# Altium PCB PCB.PcbDoc
Units mm, origin at the board's own origin, x right, y up, seen from the top; angles counter-clockwise.
Board outline 84 x 100 mm, 4 copper layers (Top Layer, Layer2, Layer3, Bottom Layer), stack 1.482 mm thick; 33 components, 28 nets, 172 pads, 8 vias.
Unrouted connection lines stored in the file: 72.
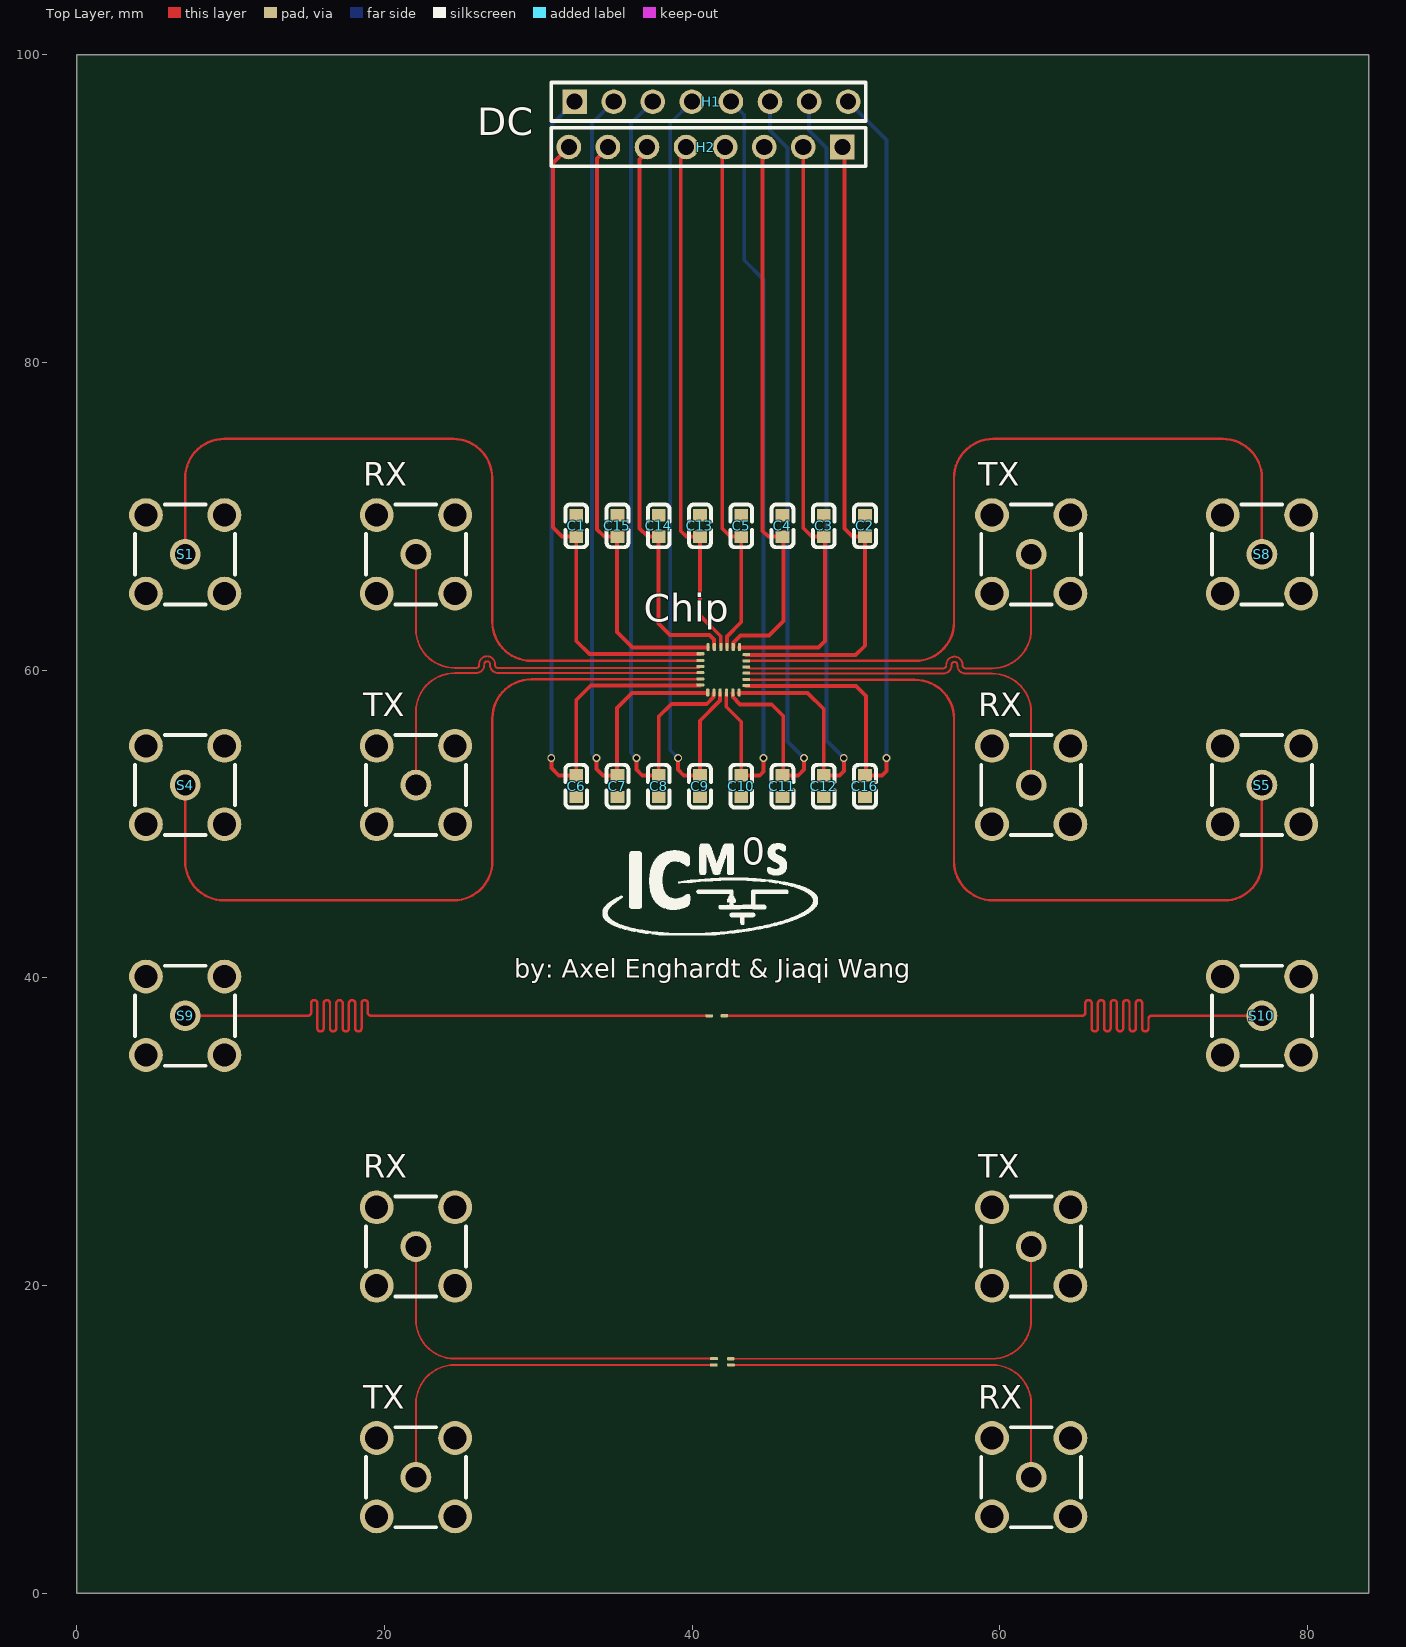
[diagram p0: Top Layer view]
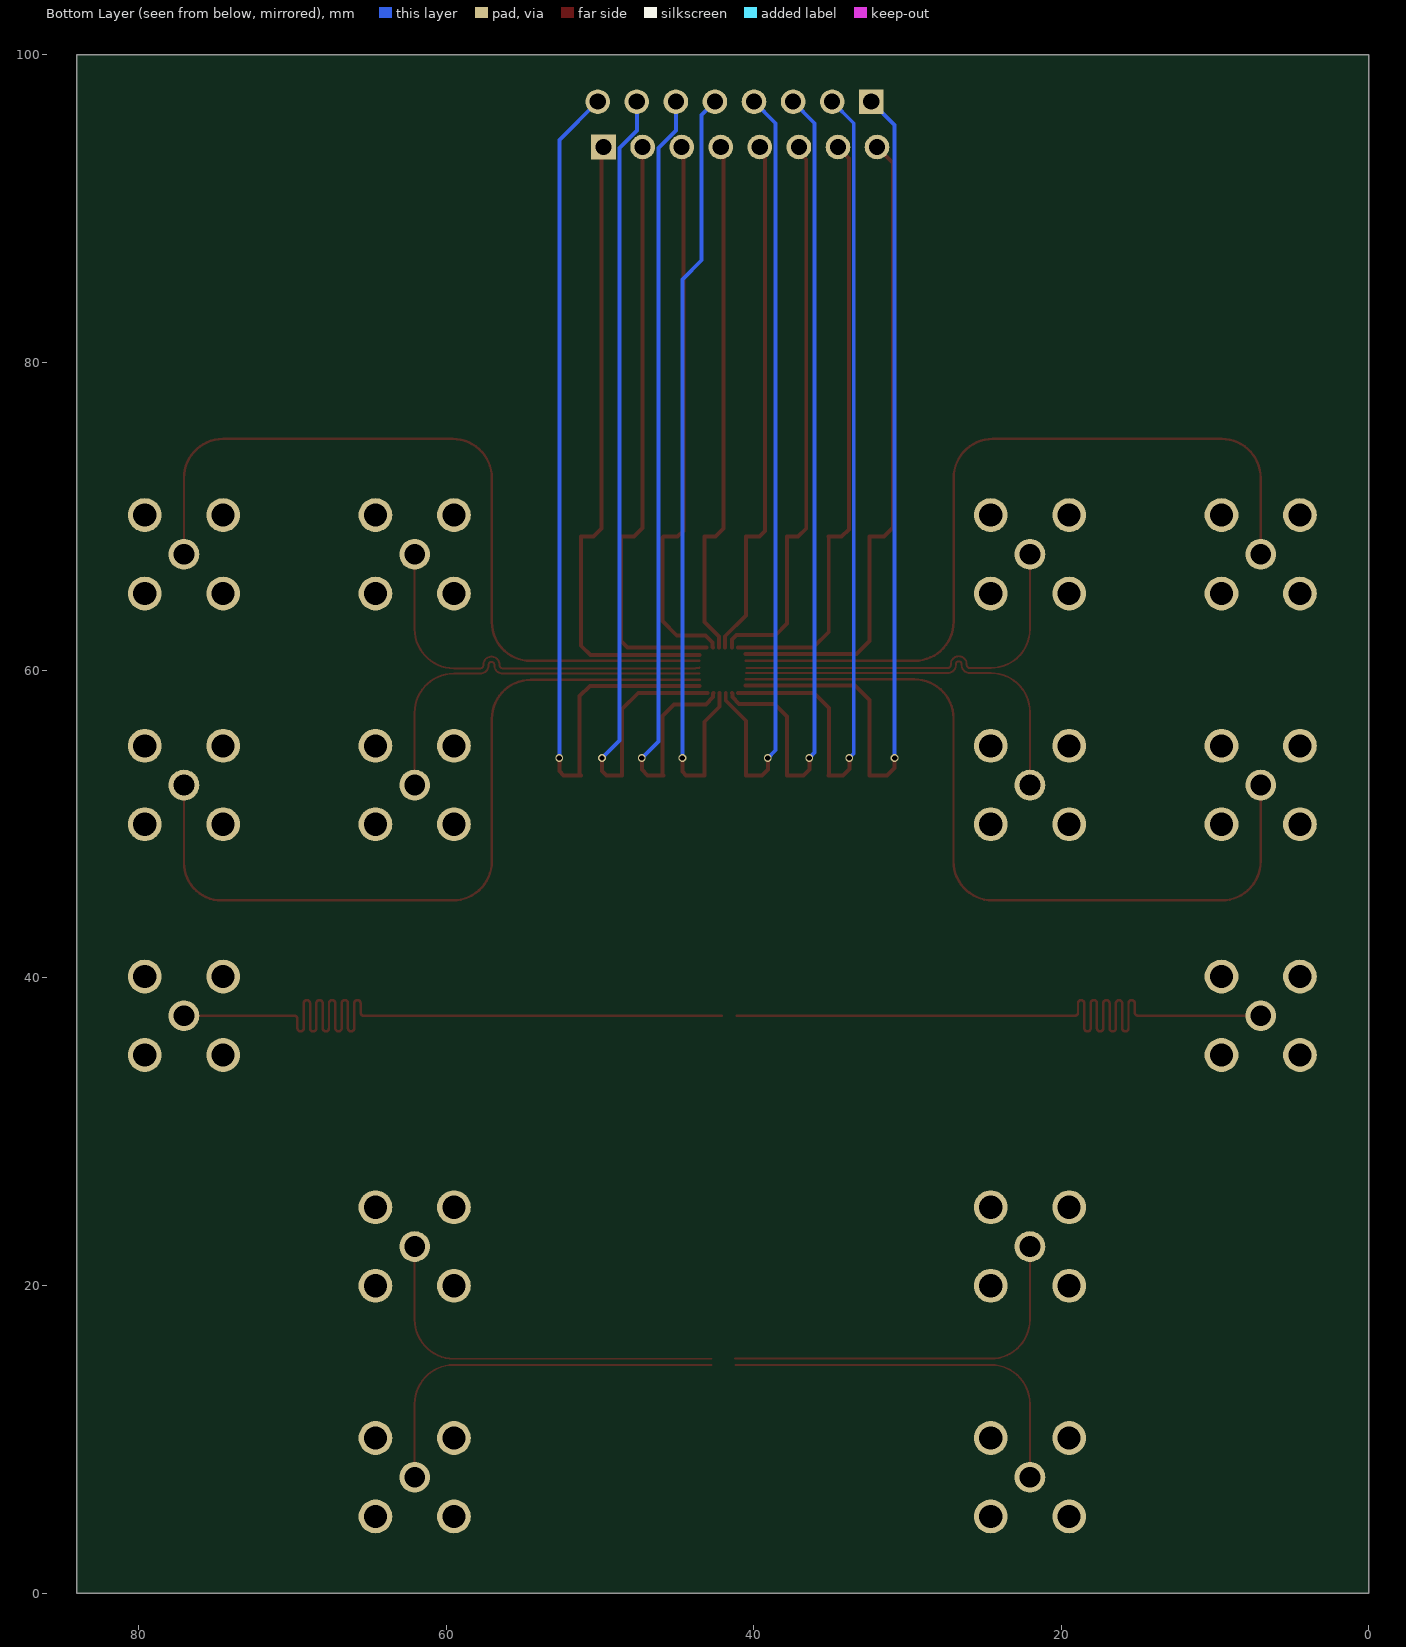
[diagram p1: Bottom Layer view, seen from below]
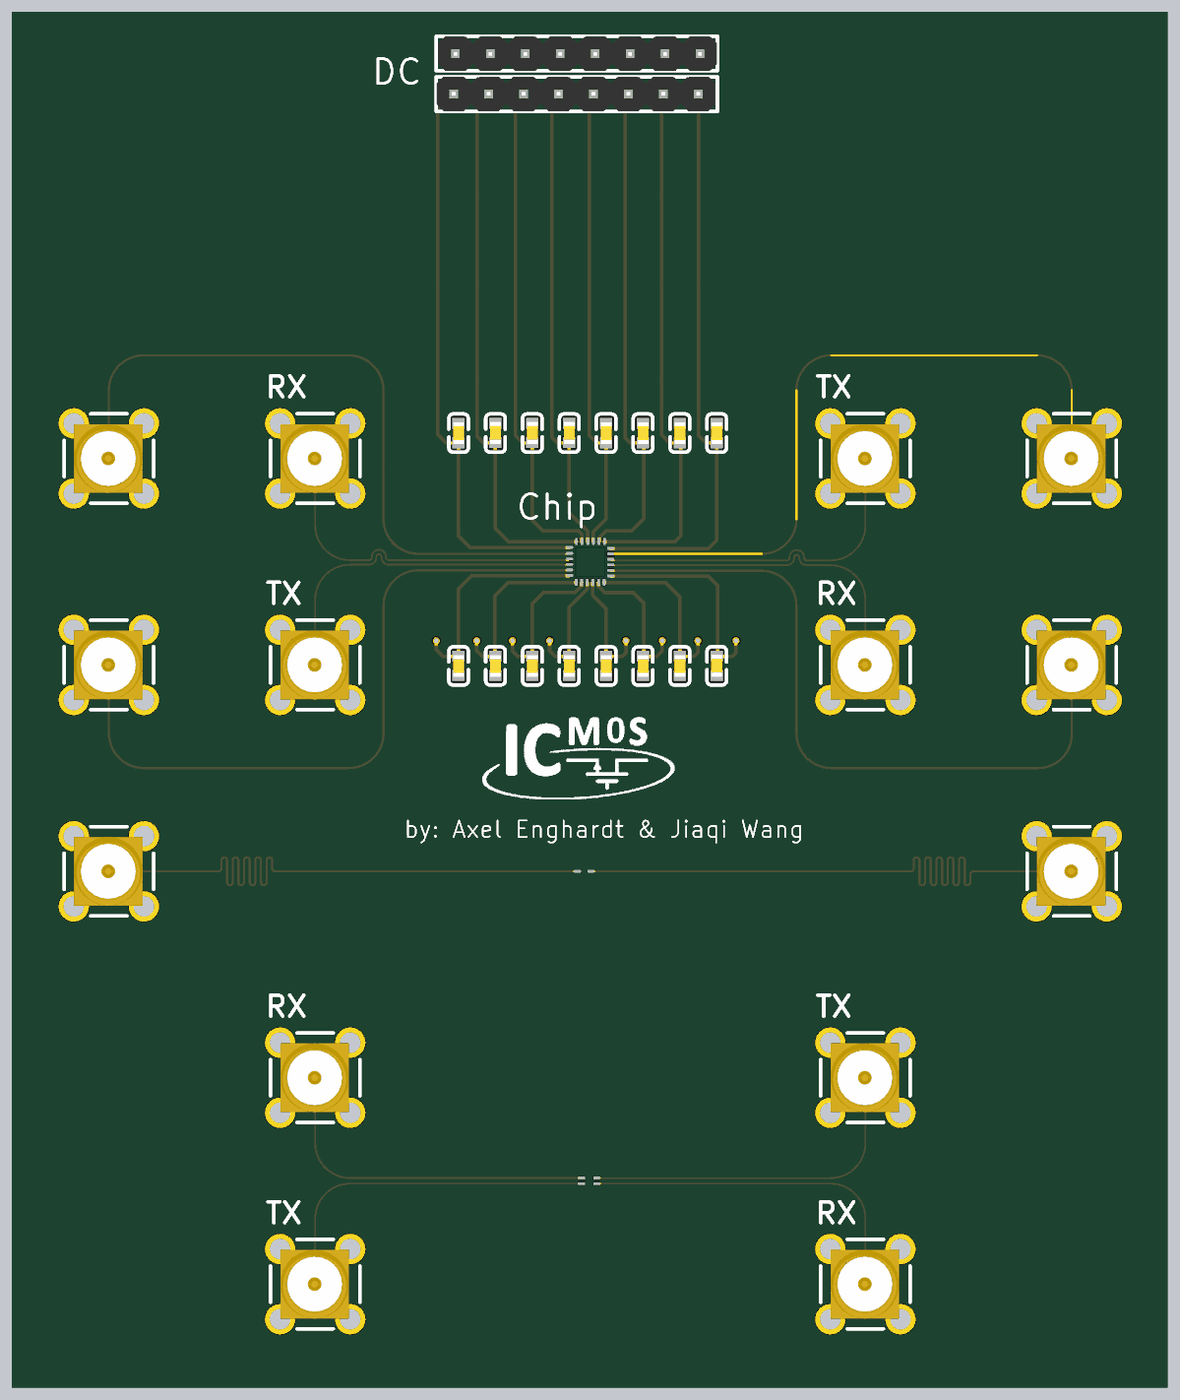
[diagram p2: 3D render of the assembled board from above, using the file's embedded part models]

## Layer stack, top to bottom
Top Solder: solder mask 0.035, Solder Resist, Dk 3.5
Top Layer: signal copper 0.168
Dielectric 2: prepreg 0.018, PP-006, Dk 4.1
Layer2: signal copper 0.2
Dielectric 1: dielectric 0.71, FR-4, Dk 4.8
Layer3: signal copper 0.2
Dielectric 3: prepreg 0.018, PP-006, Dk 4.1
Bottom Layer: signal copper 0.168
Bottom Solder: solder mask 0.035, Solder Resist, Dk 3.5

## Board outline
0,0 0,100 84,100 84,0

## Design rules (kind name [scope] priority, off if disabled: settings)
Clearance [All] p1: gap=0.1 ignorepadtopadclearanceinfootprint=FALSE
DiffPairsRouting [All] p1: maxlimit=100 minlimit=0.203 mostfreqgap=0.203 toplayer_minwidth=0.01 toplayer_maxwidth=0.124 toplayer_prefwidth=0.124 midlayer1_minwidth=0.01 midlayer1_maxwidth=0.124 midlayer1_prefwidth=0.124 midlayer2_minwidth=0.01 midlayer2_maxwidth=0.124 midlayer2_prefwidth=0.124 bottomlayer_minwidth=0.01 bottomlayer_maxwidth=0.124 bottomlayer_prefwidth=0.124 maxuncoupledlength=12.7
MinimumSolderMaskSliver [All] p1: minsoldermaskwidth=0.1
PolygonConnect [All] p1: connectstyle=Relief reliefconductorwidth=0.254 reliefentries=4 polygonreliefangle="90 Angle" airgapwidth=0.254
RoutingVias [All] p1: holewidth=0.711 width=1.27 viastyle="Through Hole" minholewidth=0.2 minwidth=0.4 maxholewidth=0.711 maxwidth=1.27
SilkToSolderMaskClearance [IsPad] p1: minsilkscreentomaskgap=0.1 clearancetoexposedcopper=TRUE
SolderMaskExpansion [All] p1: expansion=0.102 istentingtop=FALSE
SupplyNets "Schematic Supply Nets" [InNet('GND')] p1: voltage=0.000
Width RF [InNetClass('RF')] p1: maxlimit=0.156 minlimit=0.156 preferedwidth=0.156
Width [All] p2: maxlimit=0.254 minlimit=0.254 preferedwidth=0.254
27 further rules are at their usual default settings.

## Classes and differential pairs
net class RF: NetS9_5 RF1 RF2 RF3 RF4
component class sheet1: C1 C2 C3 C4 C5 C6 C7 C8 C9 C10 C11 C12 C13 C14 C15 C16 Chip H1 H2 RX S1 S4 S5 S8 S9 S10 TX
differential pair RF: +RF_P -RF_N
differential pair RF2: +RF2_P -RF2_N
differential pair RF1: +RF1_P -RF1_N

## Components (designator, comment, footprint, x,y, rotation, side; value= is the part's Value field where it differs from the comment)
C1 "C0603" C0603 32.463,69.39 r90 top
C2 "C0603" C0603 51.233,69.39 r90 top
C3 "C0603" C0603 48.552,69.39 r90 top
C4 "C0603" C0603 45.87,69.39 r90 top
C5 "C0603" C0603 43.189,69.39 r90 top
C6 "C0603" C0603 32.463,52.47 r90 top
C7 "C0603" C0603 35.144,52.47 r90 top
C8 "C0603" C0603 37.826,52.47 r90 top
C9 "C0603" C0603 40.507,52.47 r90 top
C10 "C0603" C0603 43.189,52.47 r90 top
C11 "C0603" C0603 45.87,52.47 r90 top
C12 "C0603" C0603 48.552,52.47 r90 top
C13 "C0603" C0603 40.507,69.37 r270 top
C14 "C0603" C0603 37.826,69.37 r270 top
C15 "C0603" C0603 35.144,69.37 r270 top
C16 "C0603" C0603 51.233,52.45 r270 top
Chip "2mm_24p" 2MM_8AC_16DC 45.065,60.022 r0 top (schematic designator U1)
H1 "8P" 8P 41.25,96.579 r0 top
H2 "8P" 8P 40.873,94.391 r180 top
RX "BWSMA" BWSMA#1 62.04,7.533 r0 top (schematic designator S14)
RX "BWSMA" BWSMA#1 22.04,22.533 r0 top (schematic designator S11)
RX "BWSMA" BWSMA#1 62.04,52.533 r0 top (schematic designator S6)
RX "BWSMA" BWSMA#1 22.04,67.533 r0 top (schematic designator S2)
S1 "BWSMA" BWSMA#1 7.04,67.533 r0 top
S4 "BWSMA" BWSMA#1 7.04,52.533 r0 top
S5 "BWSMA" BWSMA#1 77.04,52.533 r0 top
S8 "BWSMA" BWSMA#2 77.04,67.533 r0 top
S9 "BWSMA" BWSMA#1 7.04,37.533 r0 top
S10 "BWSMA" BWSMA#1 77.04,37.533 r0 top
TX "BWSMA" BWSMA#1 22.04,7.533 r0 top (schematic designator S13)
TX "BWSMA" BWSMA#1 62.04,22.533 r0 top (schematic designator S12)
TX "BWSMA" BWSMA#1 62.04,67.533 r0 top (schematic designator S7)
TX "BWSMA" BWSMA#1 22.04,52.533 r0 top (schematic designator S3)

## Footprints (in the part's own frame and the unit in brackets; to place one, negate y for a bottom-side part, rotate by r counter-clockwise, add the part's x,y. Pads: shape width x height; smd on the part's side, far side on the other; paste and mask are expansions set on the pad)
2MM_8AC_16DC [mm]
  rrect50% 0.5x0.2 smd mask+0.05: 1(-4.528,1.046) 2(-4.53,0.614) 3(-4.53,0.214) 4(-4.53,-0.186) 5(-4.53,-0.586) 6(-4.53,-0.989) 13(-1.543,-1.018) 14(-1.543,-0.618) 15(-1.543,-0.218) 16(-1.543,0.182) 18(-1.543,0.988)
  rect 0.1x0.05 on Mech16 mask+0.102: 1(-3.935,0.706) 2(-3.933,0.406) 3(-3.933,0.056) 4(-3.933,-0.044) 5(-3.933,-0.394) 6(-3.933,-0.694) 13(-2.133,-0.694) 14(-2.133,-0.394) 15(-2.133,-0.044) 16(-2.133,0.056) 17(-2.133,0.406) 18(-2.133,0.706)
  rrect50% 0.2x0.5 smd mask+0.05: 7(-4.052,-1.475) 8(-3.651,-1.475) 9(-3.246,-1.475) 10(-2.832,-1.475) 11(-2.421,-1.475) 12(-2.019,-1.475) 19(-1.996,1.483) 20(-2.396,1.483) 21(-2.796,1.483) 22(-3.196,1.483) 23(-3.628,1.483) 24(-4.032,1.483)
  rect 0.05x0.1 on Mech16 mask+0.102: 7(-3.733,-0.894) 8(-3.433,-0.894) 9(-3.083,-0.894) 10(-2.983,-0.894) 11(-2.633,-0.894) 12(-2.333,-0.894) 19(-2.333,0.906) 20(-2.633,0.906) 21(-2.983,0.906) 22(-3.083,0.906) 23(-3.433,0.906) 24(-3.733,0.906)
  rrect50% 0.5x0.2 smd mask+0.102: 17(-1.543,0.583)
  body extent -4.03,-0.99 -2.03,1.01, height 0.5
8P [mm]
  rect 1.6x1.6 hole 1.05: 1(-8.89,0.381)
  round 1.6 hole 1.05: 2(-6.35,0.381) 3(-3.81,0.381) 4(-1.27,0.381) 5(1.27,0.381) 6(3.81,0.381) 7(6.35,0.381) 8(8.89,0.381)
  silkscreen extent -10.41,-0.87 10.03,1.63, body extent -10.27,-0.89 10.01,1.61, height 8.6
BWSMA#1 [mm]
  round 2.2 hole 1.5 paste-2539.97 mask+0.051: 1(-2.55,-2.55) 2(-2.55,2.55) 3(2.55,2.55)
  round 2.2 hole 1.5 copper offset 0,0 paste-2539.97 mask+0.051: 4(2.55,-2.55)
  round 2 hole 1.35 paste-2539.97 mask+0.051: 5(0,0)
  silkscreen extent -3.25,-3.25 3.25,3.25, body extent -2.54,-2.5 2.46,2.5, height 8
BWSMA#2 [mm]
  round 2.2 hole 1.5 paste-2539.97 mask+0.051: 1(-2.55,-2.55) 2(-2.55,2.55) 3(2.55,2.55)
  round 2.2 hole 1.5 copper offset 0,0 paste-2539.97 mask+0.051: 4(2.55,-2.55)
  round 2 hole 1.35 paste-2539.97 mask+0.102: 5(0,0)
  silkscreen extent -3.25,-3.25 3.25,3.25, body extent -2.54,-2.5 2.46,2.5, height 8
C0603 [mm]
  rect 0.8x0.9 smd: 1(-0.71,0) 2(0.69,0)
  silkscreen extent -1.4,-0.71 1.38,0.71, body extent -0.82,-0.4 0.78,0.4, height 0.5

## Free pads (board coordinates)
  rrect50% 0.5x0.2 smd mask+0.05: 2(41.111,37.531) 3(42.089,37.535) 4(41.422,15.241) 4(42.508,15.238) 4(42.519,14.838) 5(41.407,14.838)

## Via types
v1: diameter 0.5, hole 0.35, Top Layer to Bottom Layer, 8 vias

## Nets (pads, with @x,y where several pads share a name; then routed paths per layer and width w, separated by ;. In a path a pad name is that pad's centre, name@x,y a point inside that pad or via, vN(x,y) a via of type N, cw(c..) or ccw(c..) an arc to the next point about the centre after c; other vN are vias at no path point)
DC1: C1.1 Chip.1 H2.8 | length 42.1
  Top Layer w0.254: H2.8 30.949,92.976 30.949,69.264 31.533,68.68 C1.1 32.463,61.89 33.313,61.04 Chip.1@40.523,61.04
DC9: C16.1 Chip.13 H1.8 | length 59.3
  Top Layer w0.254: Chip.13@43.508,58.976 50.647,58.976 51.313,58.31 51.313,53.24 C16.1 52.353,53.16 52.633,53.44 v1(52.633,54.29)
  Bottom Layer w0.254: H1.8 52.633,94.467 v1(52.633,54.29)
GND: C1.2 C2.2 C3.2 C4.2 C5.2 C6.1 C7.1 C8.1 C9.1 C10.1 C11.1 C12.1 C13.1 C14.1 C15.1 C16.2 RX.1 RX.2 RX.3 RX.4 S1.1 S1.2 S1.3 S1.4 S4.1 S4.2 S4.3 S4.4 S5.1 S5.2 S5.3 S5.4 S8.1 S8.2 S8.3 S8.4 S9.1 S9.2 S9.3 S9.4 S10.1 S10.2 S10.3 S10.4 TX.1 TX.2 TX.3 TX.4
NetC2_1: C2.1 Chip.18 H2.1 | length 41.5
  Top Layer w0.254: Chip.18@43.508,60.976 50.619,60.976 51.233,61.59 C2.1 50.423,68.68 49.893,69.21 49.893,93.88 H2.1
NetC3_1: C3.1 Chip.19 H2.2 | length 38.9
  Top Layer w0.254: Chip.19@43.055,61.478 48.211,61.478 48.623,61.89 48.623,68.609 C3.1 47.773,68.68 47.223,69.23 H2.2
NetC4_1: C4.1 Chip.20 H2.3 | length 36.1
  Top Layer w0.254: Chip.20@42.655,61.478 42.682,61.505 42.682,61.797 43.145,62.26 45.003,62.26 45.933,63.19 45.933,68.617 C4.1 44.953,68.68 44.573,69.06 44.573,93.9 H2.3
NetC5_1: C5.1 Chip.21 H2.4 | length 33.8
  Top Layer w0.254: H2.4@41.953,93.752 41.953,69.21 42.483,68.68 C5.1 43.189,63.126 42.255,62.192 Chip.21@42.255,61.478 ; H2.4 H2.4@42.283,93.87
NetC6_2: C6.2 Chip.6 H1.1 | length 59.1
  Top Layer w0.254: v1@30.843,54.27 30.844,54.269 30.844,53.639 31.323,53.16 C6.2 32.463,58.06 33.409,59.006 Chip.6@40.521,59.006
  Bottom Layer w0.254: v1(30.843,54.29) 30.843,95.443 H1.1
NetC7_2: C7.2 Chip.7 H1.2 | length 56.3
  Top Layer w0.254: v1@33.783,54.25 33.783,53.58 34.203,53.16 C7.2 35.103,53.202 35.103,57.53 36.093,58.52 Chip.7@41.015,58.52
  Bottom Layer w0.254: v1(33.783,54.29) 33.496,54.577 33.496,95.556 H1.2
NetC8_2: C8.2 Chip.8 H1.3 | length 53.9
  Top Layer w0.254: v1(36.383,54.29) 36.383,53.53 36.753,53.16 C8.2 37.826,56.993 38.643,57.81 40.946,57.81 41.388,58.251 41.388,58.492 Chip.8@41.415,58.519
  Bottom Layer w0.254: v1(36.383,54.29) 36.036,54.637 36.036,95.556 H1.3
NetC9_2: C9.2 Chip.9 H1.4 | length 51.6
  Top Layer w0.254: v1@39.083,54.23 39.083,53.53 39.453,53.16 C9.2 40.507,56.714 41.815,58.022 Chip.9@41.815,58.519
  Bottom Layer w0.254: v1(39.083,54.29) 38.576,54.797 38.576,95.556 H1.4
NetC10_2: C10.2 Chip.10 H1.5 | length 51.5
  Top Layer w0.254: Chip.10@42.213,58.52 42.213,57.62 43.189,56.644 C10.2 44.393,53.16 44.633,53.4 v1@44.633,54.09
  Bottom Layer w0.254: H1.5 43.383,96.097 43.383,86.65 44.633,85.4 v1(44.633,54.29)
NetC11_2: C11.2 Chip.11 H1.6 | length 53.6
  Top Layer w0.254: Chip.11@42.615,58.519 42.642,58.492 42.642,58.25 43.112,57.78 45.173,57.78 45.923,57.03 45.923,53.213 C11.2 46.893,53.16 47.273,53.54 v1@47.273,54.05
  Bottom Layer w0.254: H1.6 45.06,95.086 46.196,93.95 46.196,55.367 v1(47.273,54.29)
NetC12_2: C12.2 Chip.12 H1.7 | length 56.2
  Top Layer w0.254: Chip.12@43.015,58.519 47.504,58.519 48.552,57.472 C12.2 49.573,53.16 49.863,53.45 v1(49.863,54.29)
  Bottom Layer w0.254: H1.7 47.6,95.086 48.736,93.95 48.736,55.417 v1(49.863,54.29)
NetC13_2: C13.2 Chip.22 H2.5 | length 34.3
  Top Layer w0.254: H2.5 39.603,93.646 39.257,93.3 39.257,69.056 39.633,68.68 C13.2 40.507,63.556 41.855,62.208 Chip.22@41.855,61.478
NetC14_2: C14.2 Chip.23 H2.6 | length 36.6
  Top Layer w0.254: H2.6 37.063,93.669 36.583,93.188 36.583,69.221 37.123,68.68 C14.2 37.823,68.677 37.823,63.03 38.567,62.286 41.127,62.286 41.423,61.99 Chip.23@41.423,61.48
NetC15_2: C15.2 Chip.24 H2.7 | length 39.2
  Top Layer w0.254: H2.7 34.523,93.98 33.808,93.265 33.808,69.155 34.283,68.68 C15.2 35.123,68.659 35.123,62.49 36.134,61.48 Chip.24@41.024,61.48
NetS9_5: pad.2 pad.3 S9.5 S10.5 | length 103.9
  Top Layer w0.156: S9.5 14.94,37.533 15.018,37.533 ccw(c15.018,37.738) 15.223,37.738 15.223,38.344 cw(c15.428,38.344) 15.634,38.344 15.634,36.722 ccw(c15.839,36.722) 16.044,36.722 16.044,38.344 cw(c16.249,38.344) 16.455,38.344 16.455,36.722 ccw(c16.66,36.722) 16.865,36.722 16.865,38.344 cw(c17.07,38.344) 17.276,38.344 17.276,36.722 ccw(c17.481,36.722) 17.686,36.722 17.686,38.344 cw(c17.891,38.344) 18.097,38.344 18.097,36.722 ccw(c18.302,36.722) 18.507,36.722 18.507,38.344 cw(c18.712,38.344) 18.918,38.344 18.918,37.738 ccw(c19.123,37.738) 19.123,37.533 19.705,37.533 22.04,37.533 pad.2 pad.2 ; pad.3 65.274,37.535 65.353,37.535 ccw(c65.353,37.74) 65.558,37.74 65.558,38.346 cw(c65.763,38.346) 65.968,38.346 65.968,36.724 ccw(c66.174,36.724) 66.379,36.724 66.379,38.346 cw(c66.584,38.346) 66.789,38.346 66.789,36.724 ccw(c66.995,36.724) 67.2,36.724 67.2,38.346 cw(c67.405,38.346) 67.61,38.346 67.61,36.724 ccw(c67.816,36.724) 68.021,36.724 68.021,38.346 cw(c68.226,38.346) 68.431,38.346 68.431,36.724 ccw(c68.637,36.724) 68.842,36.724 68.842,38.346 cw(c69.047,38.346) 69.252,38.346 69.252,36.724 ccw(c69.458,36.724) 69.663,36.724 69.663,37.33 cw(c69.868,37.33) 69.868,37.535 70.448,37.535 77.037,37.535 S10.5
RF1: Chip.2 S1.5 | length 52.1
  Top Layer w0.156: S1.5 7.04,72.493 cw(c9.58,72.493) 9.58,75.033 9.592,75.033 24.463,75.033 cw(c24.463,72.493) 27.003,72.493 27.003,63.148 ccw(c29.543,63.148) 29.543,60.608 Chip.2@40.521,60.608
RF1_N: Chip.4 TX.5@22.039,52.533 | length 25.6
  Top Layer w0.124: TX.5@22.039,52.533 22.039,57.277 cw(c24.579,57.277) 24.579,59.817 24.643,59.817 25.74,59.817 25.965,59.817 ccw(c25.965,60.333) 26.481,60.333 26.481,60.39 cw(c26.67,60.39) 26.67,60.579 cw(c26.67,60.39) 26.859,60.39 26.859,60.333 ccw(c27.376,60.333) 27.376,59.817 28.324,59.817 Chip.4@40.512,59.817
RF1_P: Chip.3 RX.5@22.04,67.533 | length 25.6
  Top Layer w0.124: RX.5@22.04,67.533 22.04,62.672 ccw(c24.567,62.672) 24.567,60.144 25.74,60.144 25.965,60.144 ccw(c25.965,60.333) 26.154,60.333 26.154,60.39 cw(c26.67,60.39) 26.67,60.906 cw(c26.67,60.39) 27.187,60.39 27.187,60.333 ccw(c27.376,60.333) 27.376,60.144 28.324,60.144 Chip.3@40.457,60.144
RF2: Chip.5 S4.5 | length 52.1
  Top Layer w0.156: S4.5 7.04,47.573 ccw(c9.58,47.573) 9.58,45.033 9.679,45.033 24.473,45.033 ccw(c24.473,47.573) 27.013,47.573 27.013,56.868 cw(c29.553,56.868) 29.553,59.408 Chip.5@40.521,59.408
RF2_N: Chip.15 RX.5@62.04,52.533 | length 25.6
  Top Layer w0.124: Chip.15@43.512,59.78 56.097,59.78 56.329,59.78 ccw(c56.329,60.31) 56.859,60.31 56.859,60.353 cw(c57.048,60.353) 57.237,60.353 57.237,60.31 ccw(c57.767,60.31) 57.767,59.78 58.44,59.78 59.5,59.78 cw(c59.5,57.241) 62.04,57.241 RX.5@62.04,52.533
RF2_P: Chip.16 TX.5@62.04,67.533 | length 25.8
  Top Layer w0.124: Chip.16@43.508,60.176 43.546,60.138 43.752,60.138 43.769,60.121 56.097,60.121 56.329,60.121 ccw(c56.329,60.31) 56.518,60.31 56.518,60.353 cw(c57.048,60.353) 57.578,60.353 57.578,60.31 ccw(c57.767,60.31) 57.767,60.121 58.44,60.121 59.5,60.121 ccw(c59.5,62.661) 62.04,62.661 TX.5@62.04,67.533
RF3: Chip.14 S5.5 | length 52.1
  Top Layer w0.156: Chip.14@43.508,59.376 54.483,59.376 cw(c54.483,56.836) 57.023,56.836 57.023,47.573 ccw(c59.563,47.573) 59.563,45.033 74.595,45.033 ccw(c74.595,47.477) 77.039,47.477 S5.5
RF4: Chip.17 S8.5 | length 52.2
  Top Layer w0.156: Chip.17@43.522,60.604 54.51,60.604 ccw(c54.51,63.117) 57.023,63.117 57.023,72.493 cw(c59.563,72.493) 59.563,75.033 74.5,75.033 cw(c74.5,72.493) 77.04,72.493 S8.5
RF_N: pad.4@42.519,14.838 pad.5 RX.5@62.04,7.533 TX.5@22.04,7.533 | length 50.9
  Top Layer w0.124: TX.5@22.04,7.533 22.04,12.298 cw(c24.58,12.298) 24.58,14.838 24.7,14.838 pad.5@41.191,14.838 ; pad.4@42.744,14.838 59.3,14.838 59.5,14.838 cw(c59.5,12.298) 62.04,12.298 RX.5@62.04,7.533
RF_P: pad.4@41.422,15.241 pad.4@42.508,15.238 RX.5@22.04,22.533 TX.5@62.04,22.533 | length 50.9
  Top Layer w0.124: RX.5@22.04,22.533 22.04,17.781 ccw(c24.58,17.781) 24.58,15.241 24.7,15.241 pad.4@41.216,15.241 ; pad.4@42.739,15.238 59.3,15.238 59.5,15.238 ccw(c59.5,17.778) 62.04,17.778 TX.5@62.04,22.533

## Silkscreen, mask and mechanical layers (free items; w line width, h text height)
Top Overlay:
  drawing of 25 lines, arcs and shapes, not listed
  text "DC" at 26.034,94.779 h1.8
  text "0" at 43.213,46.757 h3
  text "by: Axel Enghardt & Jiaqi Wang" at 28.42,40.02 h1.2
Mechanical 1:
  the board outline again, w0.254
Bottom Wire Bonding:
  drawing of 9 lines, arcs and shapes, not listed
Top Wire Bonding:
  lines w0.025 net NetS9_5: 41.186,37.525 42.04,37.533
  lines w0.025 net RF_N: 41.536,14.83 42.377,14.83
  lines w0.025 net RF_P: 41.551,15.227 42.375,15.223